# Altium PCB PCB_TA_THI_THU_PHUONG.PcbDoc
Units mm, origin at the board's own origin, x right, y up, seen from the top; angles counter-clockwise.
Board outline 116.52 x 102.67 mm, 2 copper layers (Top Layer, Bottom Layer); 31 components, 26 nets, 105 pads, 26 vias.
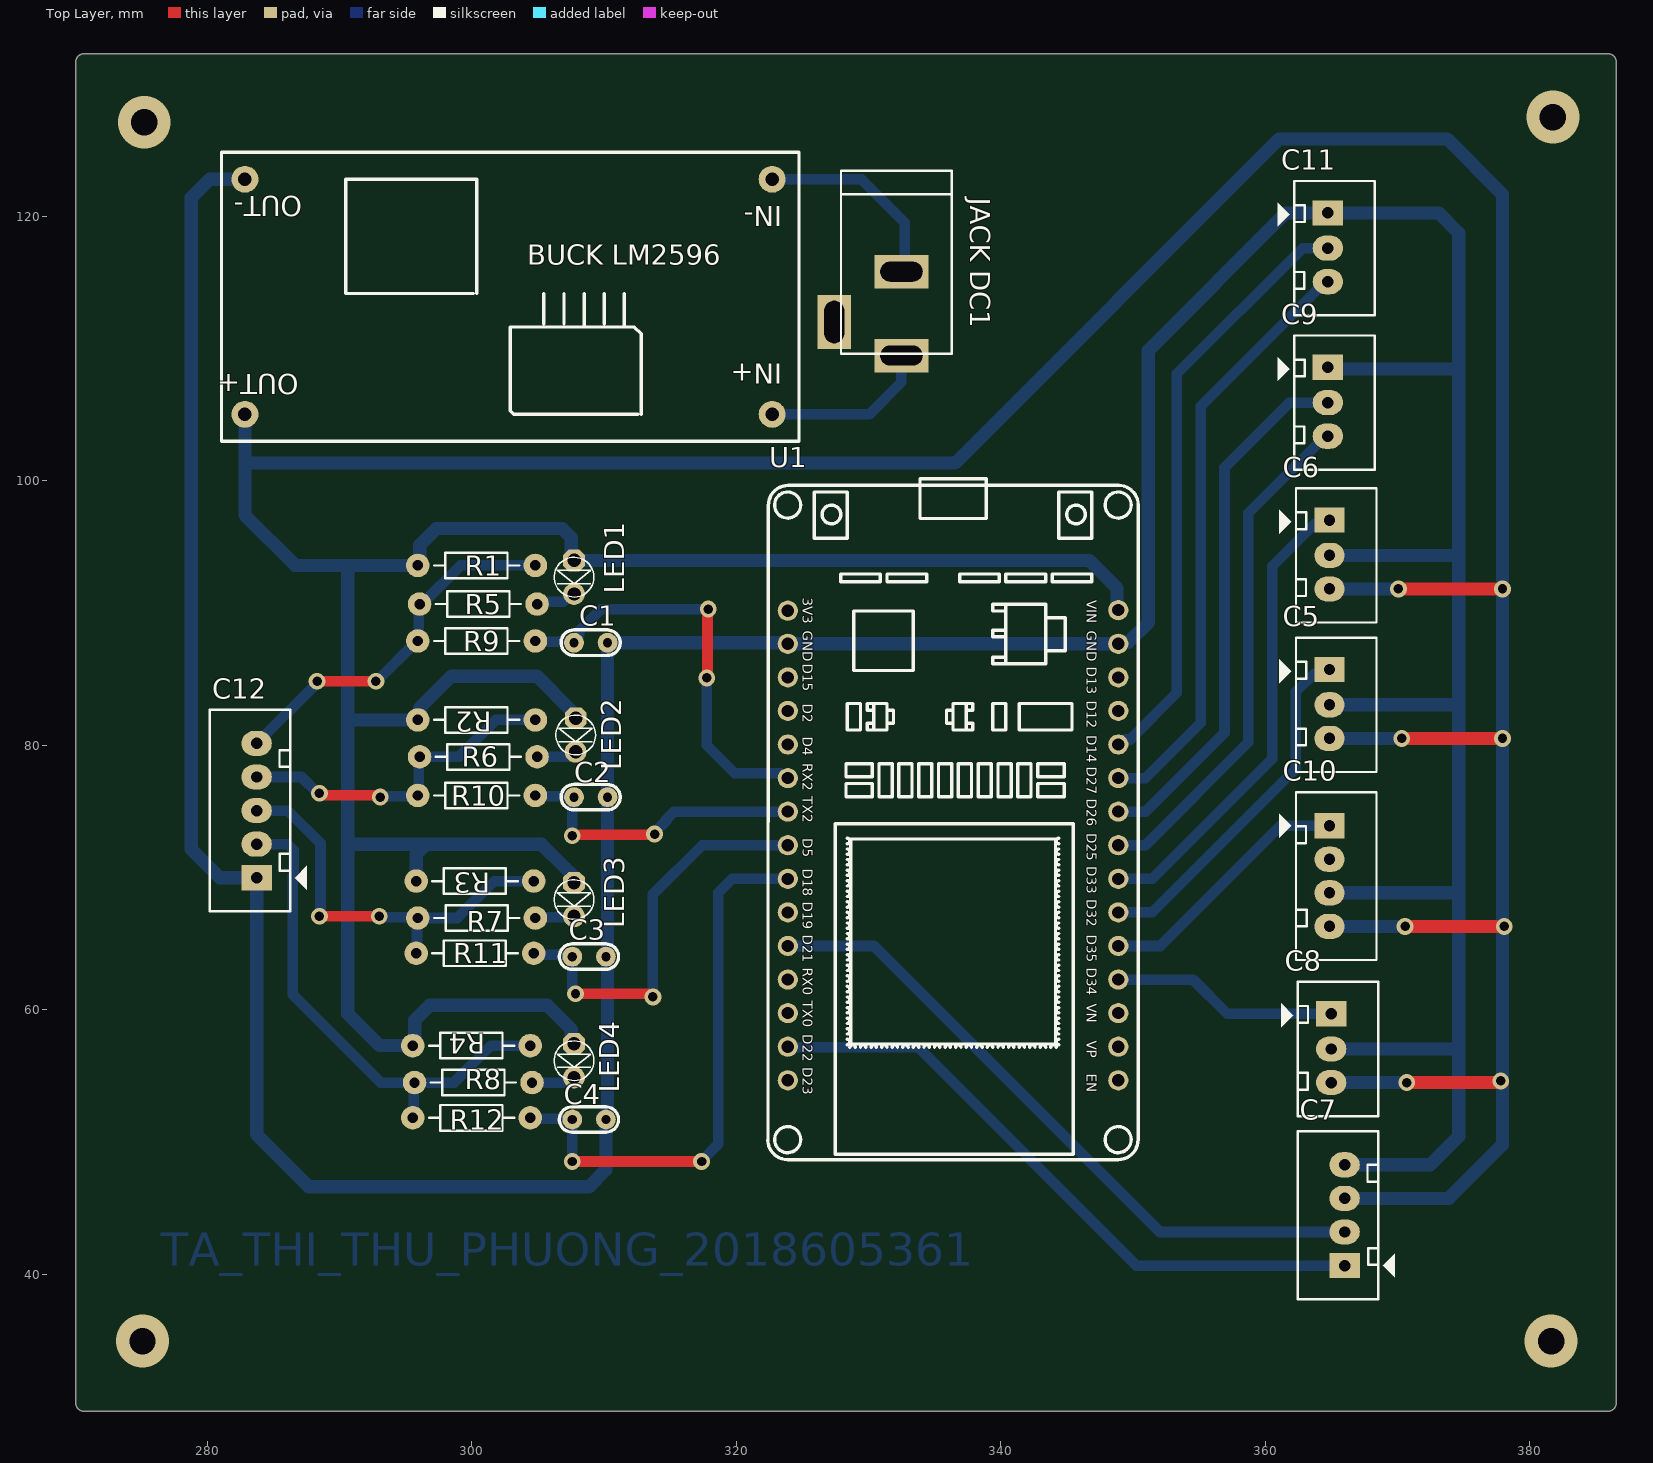
[diagram p0: Top Layer view]
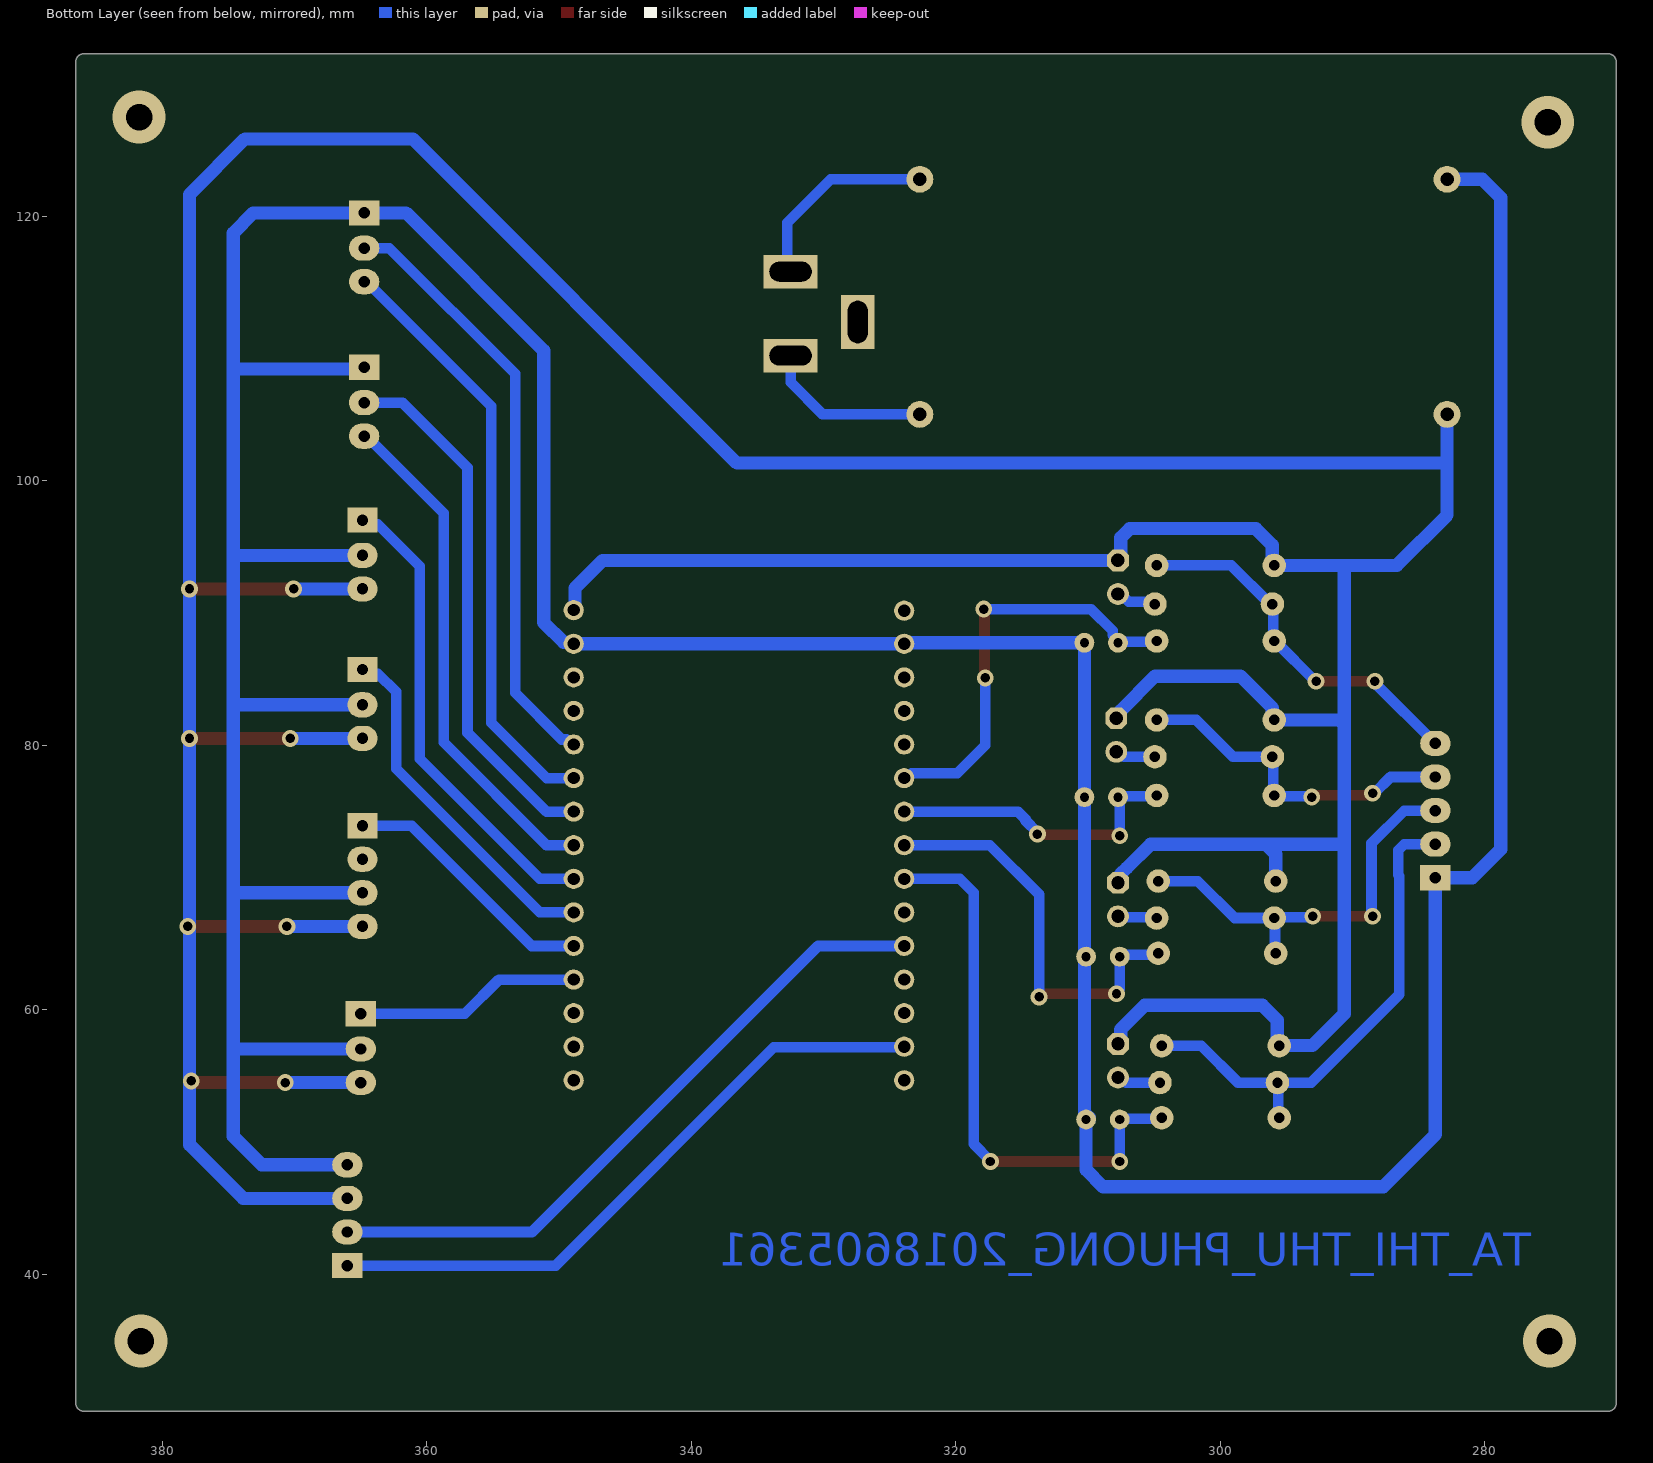
[diagram p1: Bottom Layer view, seen from below]
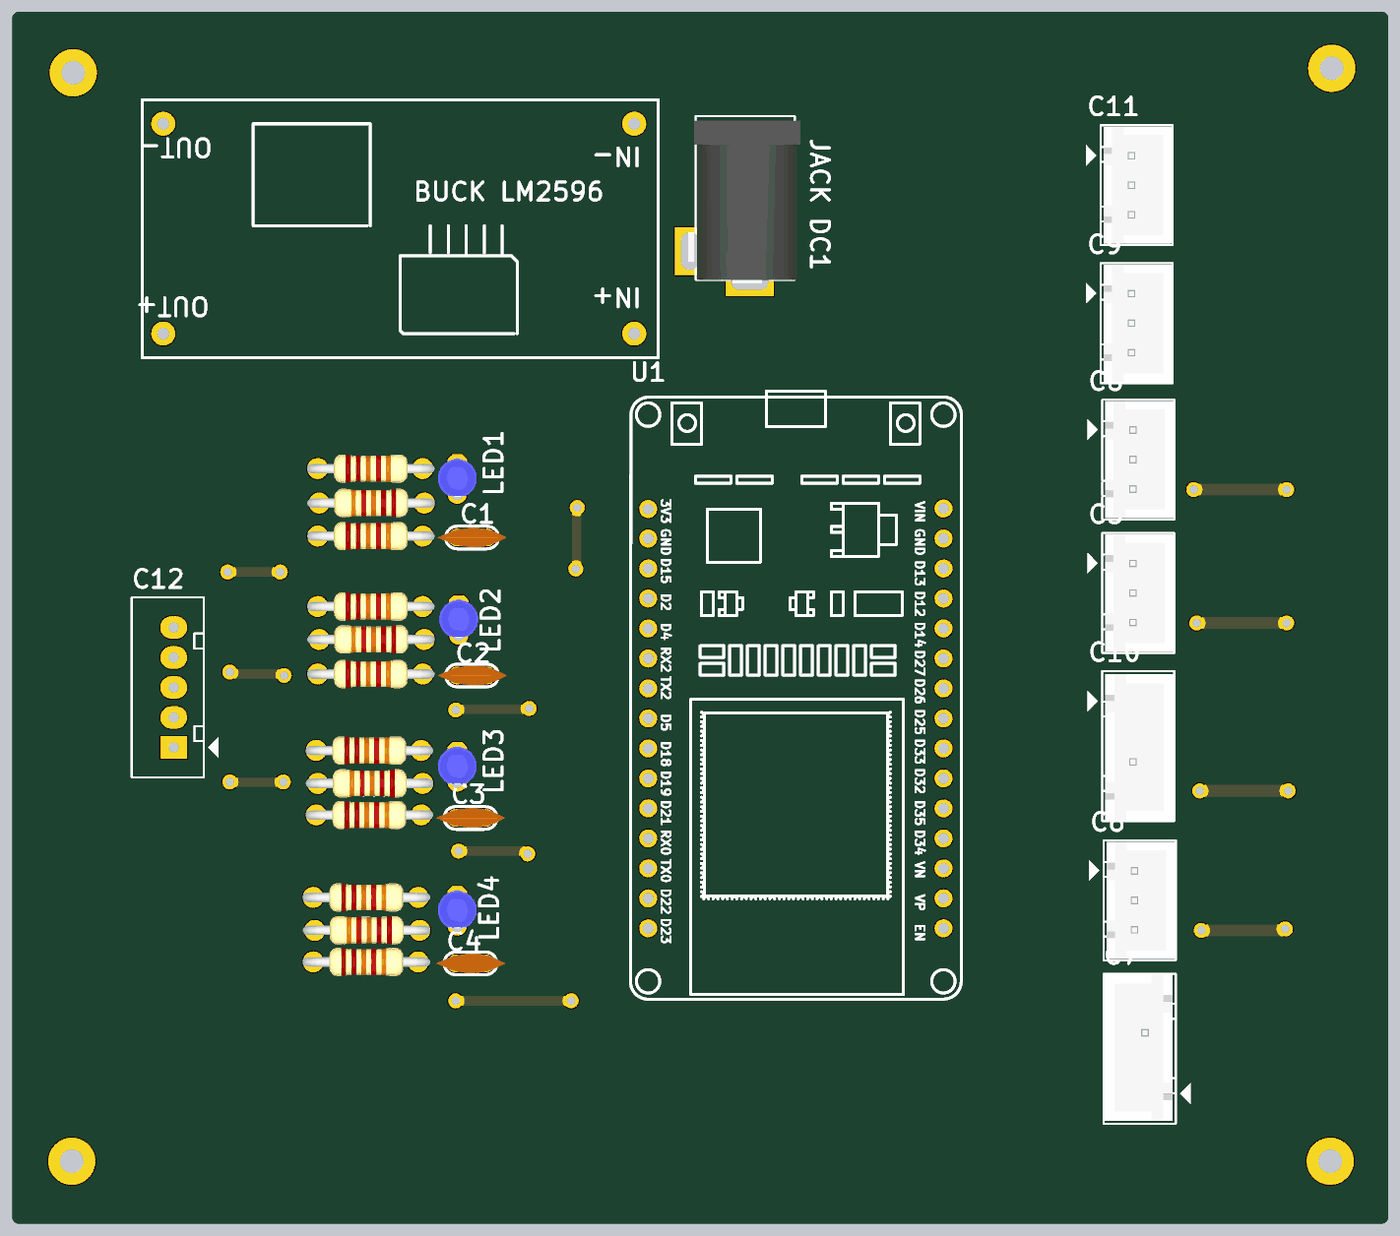
[diagram p2: 3D render of the assembled board from above, using the file's embedded part models]

## Layer stack, top to bottom
Top Solder: solder mask 0.0102, Solder Resist, Dk 3.5
Top Layer: signal copper 0.0356
Dielectric 1: dielectric 0.32, FR-4, Dk 4.8
Bottom Layer: signal copper 0.0356
Bottom Solder: solder mask 0.0102, Solder Resist, Dk 3.5

## Board outline
270.037,30.226 ccw(c270.637,30.226) 270.637,29.626 385.953,29.626 ccw(c385.953,30.226) 386.553,30.226 386.553,131.699 ccw(c385.953,131.699) 385.953,132.299 270.637,132.299 ccw(c270.637,131.699) 270.037,131.699

## Design rules (kind name [scope] priority, off if disabled: settings)
Clearance [All] p1: gap=1 ignorepadtopadclearanceinfootprint=FALSE
PolygonConnect [All] p1: connectstyle=Relief reliefconductorwidth=0.254 reliefentries=4 polygonreliefangle="90 Angle" airgapwidth=0.254
RoutingVias [All] p1: holewidth=0.711 width=1.27 viastyle="Through Hole" minholewidth=0.711 minwidth=1.27 maxholewidth=0.711 maxwidth=1.27
SolderMaskExpansion [All] p1: expansion=0.102 istentingtop=FALSE
Width GND_ISO [InNet('GND_ISO')] p1: maxlimit=1 minlimit=1 preferedwidth=1
Width COM_O_1 [InNet('COM_O_1')] p2: maxlimit=1.5 minlimit=1.5 preferedwidth=1.5
Width COM_O_2 [InNet('COM_O_2')] p3: maxlimit=1.5 minlimit=1.5 preferedwidth=1.5
Width VCC_ISO [InNet('VCC5_ISO')] p4: maxlimit=1 minlimit=1 preferedwidth=1
Width GND [InNet('GND')] p5: maxlimit=1 minlimit=1 preferedwidth=1
Width VCC [InNet('VCC5')] p6: maxlimit=1 minlimit=1 preferedwidth=1
Width SIGNAL [All] p7: maxlimit=0.8 minlimit=0.8 preferedwidth=0.8
30 further rules are at their usual default settings.

## Components (designator, comment, footprint, x,y, rotation, side; value= is the part's Value field where it differs from the comment)
"BUCK LM2596" "Buck LM2596" "BUCK LM2596" 303.149,113.157 r180 top
C1 "104" "tu gom" 308.991,87.757 r0 top
C2 "104" "tu gom" 308.991,76.073 r0 top
C3 "104" "tu gom" 308.864,64.008 r0 top
C4 "104" "tu gom" 308.864,51.689 r0 top
C5 "POS1" Header3 364.871,85.598 r270 top
C6 "POS2" Header3 364.871,96.901 r270 top
C7 "LCD_I2C" Header4 366.014,40.64 r90 top
C8 "SS_LIGHT" Header3 364.998,59.563 r270 top
C9 "Header3" Header3 364.744,108.458 r270 top
C10 "SS-RAIN" Header4 364.871,73.914 r270 top
C11 "Header3" Header3 364.744,120.142 r270 top
C12 "Header5" Header5 283.718,69.977 r90 top
"JACK DC1" "JACK DC 5.5" "JACK DC 5.5" 329.946,112.649 r270 top value="Jac DC"
LED1 "LED 3mm" LED-3MM-BLUE 307.723,92.583 r270 top
LED2 "LED 3mm" LED-3MM-BLUE 307.848,80.645 r270 top
LED3 "LED 3mm" LED-3MM-BLUE 307.721,68.199 r270 top
LED4 "LED 3mm" LED-3MM-BLUE 307.721,56.007 r270 top
R1 "10K" R1/4W 304.8,93.599 r180 top value="R1/4W - 1K"
R2 "10K" R1/4W 304.8,81.915 r180 top value="R1/4W - 1K"
R3 "10K" R1/4W 304.673,69.723 r180 top value="R1/4W - 1K"
R4 "10K" R1/4W 304.419,57.277 r180 top value="R1/4W - 1K"
R5 "220R" R1/4W 296.037,90.678 r0 top value="R1/4W - 1K"
R6 "220R" R1/4W 296.037,79.121 r0 top value="R1/4W - 1K"
R7 "220R" R1/4W 295.91,66.929 r0 top value="R1/4W - 1K"
R8 "220R" R1/4W 295.656,54.483 r0 top value="R1/4W - 1K"
R9 "1K" R1/4W 304.8,87.884 r180 top value="R1/4W - 1K"
R10 "1K" R1/4W 304.8,76.2 r180 top value="R1/4W - 1K"
R11 "1K" R1/4W 304.673,64.262 r180 top value="R1/4W - 1K"
R12 "1K" R1/4W 304.419,51.816 r180 top value="R1/4W - 1K"
U1 "ESP32_MODULE copy" ESP32-WIFIMODULE-FOOTPRINT 334.264,74.168 r180 top

## Footprints (in the part's own frame and the unit in brackets; to place one, negate y for a bottom-side part, rotate by r counter-clockwise, add the part's x,y. Pads: shape width x height; smd on the part's side, far side on the other; paste and mask are expansions set on the pad)
"BUCK LM2596" [mil]
  round 80 hole 40: 1(-770,320) 2(-770,-380) 3(800,-380) 4(800,320)
  silkscreen extent -850,-460 870,400
ESP32-WIFIMODULE-FOOTPRINT [mil]
  round 60 hole 36: 1(-575.9,768.25) 2(-575.9,668.25) 3(-575.9,568.25) 4(-575.9,468.25) 5(-575.9,368.25) 6(-575.9,268.25) 7(-575.9,168.25) 8(-575.9,68.25) 9(-575.9,-31.75) 10(-575.9,-131.75) 11(-575.9,-231.75) 12(-575.9,-331.75) 13(-575.9,-431.75) 14(-575.9,-531.75) 15(-575.9,-631.75) 16(408.35,-630.18) 17(408.35,-531.75) 18(408.35,-431.75) 19(408.35,-331.75) 20(408.35,-231.75) 21(408.35,-131.75) 22(408.35,-31.75) 23(408.35,68.25) 24(408.35,168.25) 25(408.35,268.25) 26(408.35,368.25) 27(408.35,468.25) 28(408.35,568.25) 29(408.35,668.25) 30(408.35,768.25)
  silkscreen extent -635,-1023 468,1005
Header3 [mil] "CON 3"
  rect 75x90 hole 34: 1(-5,0)
  oval 75x90 hole 34: 2(100,0) 3(200,0)
  silkscreen extent -100,-150 300,140, body extent -95,-90 295,136, height 276
Header4 [mil] "CON4"
  rect 75x90 hole 34: 1(0,0)
  oval 75x90 hole 34: 2(100,0) 3(200,0) 4(300,0)
  silkscreen extent -100,-150 400,140, body extent -90,-90 398,136, height 276
Header5 [mil] "CON5"
  rect 75x90 hole 34: 1(0,0)
  oval 75x90 hole 34: 2(100,0) 3(200,0) 4(300,0) 5(400,0)
  silkscreen extent -100,-150 500,140
"JACK DC 5.5" [mm] "Jac DC input"
  rect 2.54x4.064 hole 1.5 slot 3.2 at 90 deg: 1(3.175,2.54) 2(-3.175,2.54)
  rect 4.064x2.54 hole 1.5 slot 3.2 at 0 deg: 3(0.635,-2.54)
  silkscreen extent -10.8,-2.03 3.05,6.35, body extent -10.42,-2.67 3.4,6.84, height 11.02
LED-3MM-BLUE [mil]
  oct 65x65 hole 40: 1(-55,0)
  round 65 hole 40: 2(45,0)
  silkscreen extent -64,-59 54,59, body extent -72,-65 54,65, height 184
R1/4W [mil]
  round 70 hole 31: 1(0,0) 2(350,0)
  silkscreen extent 48,-38 302,38, body extent -40,-47 386,47, height 111
"tu gom" [mm] "Tu gom mini"
  round 1.5 hole 0.7: 1(-1.27,0) 2(1.27,0)
  silkscreen extent -2.25,-0.97 2.22,0.97, body extent -2.92,-0.85 2.92,0.85, height 6.12

## Part data
C1 C2 C3 C4: library part "Tu gom 104 50V", "Cắm", Chung_Loai=Cắm, Don_Vi=Con, Ma_Hang=MH004761, So_Chan=2, Ten_Linh_Kien="Tụ gốm 104 100nF 50V"
C5 C6 C8: library part Header3, "Header IDC, 3 x 1 Pin Vertical 2.54mm Pitch (Non-Boxed, Male)", Manufacturer="W¨¹rth Elektronik eiSos GmbH", partNo=613002143121, ComponentLink1 Description=Manufacturer, ComponentLink1URL=http://www.we-online.com, ComponentLink2 Description=Datasheet, ComponentLink2URL=http://katalog.we-online.de/em/datasheet/6130xx143121.pdf, Created by="Karrer Zheng", Created Date="29 March 2013", NoPins=02
C7 C10: library part Header4, "Header IDC, 4 x 1 Pin Vertical 2.54mm Pitch (Non-Boxed, Male)", Manufacturer="W¨¹rth Elektronik eiSos GmbH", partNo=613002143121, ComponentLink1 Description=Manufacturer, ComponentLink1URL=http://www.we-online.com, ComponentLink2 Description=Datasheet, ComponentLink2URL=http://katalog.we-online.de/em/datasheet/6130xx143121.pdf, Created by="Karrer Zheng", Created Date="29 March 2013", NoPins=02
C9 C11: "Header IDC, 3 x 1 Pin Vertical 2.54mm Pitch (Non-Boxed, Male)", Manufacturer="W¨¹rth Elektronik eiSos GmbH", partNo=613002143121, ComponentLink1 Description=Manufacturer, ComponentLink1URL=http://www.we-online.com, ComponentLink2 Description=Datasheet, ComponentLink2URL=http://katalog.we-online.de/em/datasheet/6130xx143121.pdf, Created by="Karrer Zheng", Created Date="29 March 2013", NoPins=02
C12: "Header IDC, 5 x 1 Pin Vertical 2.54mm Pitch (Non-Boxed, Male)", Manufacturer="W¨¹rth Elektronik eiSos GmbH", partNo=613002143121, ComponentLink1 Description=Manufacturer, ComponentLink1URL=http://www.we-online.com, ComponentLink2 Description=Datasheet, ComponentLink2URL=http://katalog.we-online.de/em/datasheet/6130xx143121.pdf, Created by="Karrer Zheng", Created Date="29 March 2013", NoPins=02
LED1 LED2 LED3 LED4: library part "LED 3mm Xanh Duong", "Cắm", Chung_Loai=Cắm, Don_Vi=Con, Ma_Hang=MH009003, Ten_Linh_Kien="LED 3MM Xanh Dương SS (1000c)"
R1 R2 R3 R4 R5 R6 R7 R8 R9 R10 R11 R12: library part R1/4W, "Resistor 1/4W"

## Via types
v1: diameter 1.27, hole 0.711, Top Layer to Bottom Layer, 22 vias
v2: diameter 4, hole 2, Top Layer to Bottom Layer, 4 vias

## Nets (pads, with @x,y where several pads share a name; then routed paths per layer and width w, separated by ;. In a path a pad name is that pad's centre, name@x,y a point inside that pad or via, vN(x,y) a via of type N, cw(c..) or ccw(c..) an arc to the next point about the centre after c; other vN are vias at no path point)
ADC1: C8.1 U1.4 | length 17.2
  Bottom Layer w0.8: U1.4 354.54,62.274 357.124,59.69 C8.1
ADC2: C10.1 U1.5 | length 19.7
  Bottom Layer w0.8: U1.5 352.058,64.814 361.158,73.914 C10.1
GND: "BUCK LM2596.3" C1.2 C2.2 C3.2 C4.2 C5.2 C6.2 C7.4 C8.2 C9.1 C10.3 C11.1 C12.1 U1.14 U1.17 | length 365.7
  Bottom Layer w1: 282.829,122.809 280.162,122.809 278.765,121.412 278.765,72.136 280.924,69.977 C12.1 283.718,50.546 287.655,46.609 308.864,46.609 310.134,47.879 C4.2 ; C4.2@309.88,51.689 309.88,51.824 310.261,52.205 310.261,63.746 310.134,63.873 C3.2 ; C3.2@310.261,64.008 C2.2 C1.2 323.795,87.757 324.004,87.547 U1.17@324.146,87.547 ; U1.17 U1.14 348.992,87.775 349.651,87.775 351.155,89.279 351.155,109.855 361.569,120.269 C11.1 373.126,120.269 374.65,118.745 374.65,108.458 ; C9.1 364.871,108.458 374.65,108.458 ; C10.3 374.523,68.834 374.65,68.707 ; C5.2 374.65,83.058 ; C6.2 374.523,94.361 374.65,94.234 ; C8.2 374.523,57.023 374.65,56.896 ; C7.4 372.491,48.26 374.65,50.419 374.65,56.896 ; 374.65,56.896 374.65,68.707 ; 374.65,68.707 374.65,83.058 ; 374.65,83.058 374.65,94.234 ; 374.65,94.234 374.65,108.458
IN_0: C1.1 R9.1 U1.21 | length 32
  Top Layer w0.8: v1(317.754,85.09) 317.817,85.153 317.817,90.233 v1(317.881,90.297)
  Bottom Layer w0.8: R9.1 304.863,87.82 307.657,87.82 C1.1 307.721,87.946 308.111,88.336 308.111,88.648 309.76,90.297 v1(317.881,90.297) ; v1(317.754,85.09) 317.754,80.01 319.872,77.892 323.318,77.892 323.696,77.514 U1.21
IN_1: C2.1 R10.1 U1.22 | length 23.1
  Top Layer w0.8: v1(307.594,73.152) 307.657,73.215 313.753,73.215 v1(313.817,73.279)
  Bottom Layer w0.8: R10.1 304.863,76.136 307.657,76.136 C2.1 307.594,75.946 v1(307.594,73.152) ; v1(313.817,73.279) 313.817,73.406 314.717,74.306 314.717,74.409 315.282,74.974 U1.22
IN_2: C3.1 R11.1 U1.23 | length 31.4
  Top Layer w0.8: v1(307.834,61.2) 313.323,61.2 313.563,60.96 v1(313.69,60.96)
  Bottom Layer w0.8: R11.1 304.8,64.135 307.467,64.135 C3.1 307.594,61.567 307.834,61.327 v1(307.834,61.2) ; v1(313.69,60.96) 313.69,68.707 317.417,72.434 U1.23
IN_3: C4.1 R12.1 U1.24 | length 42.5
  Top Layer w0.8: v1(307.594,48.514) v1(317.373,48.514)
  Bottom Layer w0.8: R12.1 304.483,51.752 307.276,51.752 C4.1@307.34,51.689 ; v1(307.594,48.514) C4.1 ; v1(317.373,48.514) 317.373,48.569 318.643,49.839 318.643,68.834 319.703,69.894 U1.24
L298_INA: C9.3 U1.8 | length 38.8
  Bottom Layer w0.8: U1.8 350.951,72.434 358.728,80.211 358.728,97.552 364.553,103.378 C9.3
L298_INB: C9.2 U1.9 | length 40.4
  Bottom Layer w0.8: U1.9 350.945,74.974 356.928,80.957 356.928,101.001 361.845,105.918 C9.2
L298_INC: C11.3 U1.10 | length 45.4
  Bottom Layer w0.8: U1.10 350.94,77.514 355.128,81.703 355.128,105.636 364.553,115.062 C11.3
L298_IND: C11.2 U1.11 | length 45.5
  Bottom Layer w0.8: U1.11 349.088,80.054 349.466,80.432 349.788,80.432 353.328,83.973 353.328,108.091 362.839,117.602 C11.2
"NetBUCK LM2596_2": "BUCK LM2596.2" "JACK DC1.2" | length 15.2
  Bottom Layer w0.8: 322.707,122.809 329.438,122.809 332.74,119.507 332.74,116.078 332.486,115.824
NetLED1_2: LED1.2 R5.2 | length 3.1
  Bottom Layer w0.8: R5.2 305.114,90.865 306.918,90.865 307.493,91.44 LED1.2
NetLED2_2: LED2.2 R6.2 | length 3.1
  Bottom Layer w0.8: R6.2 307.237,79.121 307.618,79.502 LED2.2
NetLED3_2: LED3.2 R7.2 | length 3
  Bottom Layer w0.8: R7.2 304.863,66.992 307.657,66.992 LED3.2
NetLED4_2: LED4.2 R8.2 | length 3.3
  Bottom Layer w0.8: R8.2 307.11,54.483 307.491,54.864 LED4.2
OUT_BTN_0: C12.5 R1.1 R5.1 R9.2 | length 28.3
  Top Layer w0.8: v1(288.29,84.836) v1(292.735,84.836)
  Bottom Layer w0.8: C12.5 288.29,84.709 v1(288.29,84.836) ; v1(292.735,84.836) 292.798,84.836 295.846,87.884 R9.2 295.974,87.947 295.974,90.614 R5.1 296.226,90.678 299.147,93.599 R1.1
OUT_BTN_1: C12.4 R2.1 R6.1 R10.2 | length 25.8
  Top Layer w0.8: v1(288.465,76.363) 288.555,76.273 288.887,76.273 288.96,76.2 292.609,76.2 292.646,76.163 292.978,76.163 v1(293.068,76.073)
  Bottom Layer w0.8: C12.4 287.104,77.597 288.338,76.363 v1(288.465,76.363) ; v1(293.068,76.073) 293.132,76.136 295.846,76.136 R10.2 295.974,76.263 295.974,79.057 R6.1 299.022,79.121 301.815,81.915 R2.1
OUT_BTN_2: C12.3 R3.1 R7.1 R11.2 | length 31.5
  Top Layer w0.8: v1(288.465,67.056) v1(292.989,67.056)
  Bottom Layer w0.8: C12.3 286.067,75.057 288.544,72.58 288.544,67.135 v1(288.465,67.056) ; v1(292.989,67.056) 293.053,66.992 295.846,66.992 R7.1 ; R11.2 295.846,64.325 295.846,66.865 R7.1 ; R3.1 301.689,69.723 298.895,66.929 R7.1
OUT_BTN_3: C12.2 R4.1 R8.1 R12.2 | length 38.6
  Bottom Layer w0.8: C12.2 286.061,72.517 286.53,72.048 286.53,70.197 286.43,70.097 286.43,61.169 293.116,54.483 R8.1 ; R12.2 295.592,51.88 295.592,54.419 R8.1 ; R4.1 301.435,57.277 298.64,54.483 R8.1
SCL: C7.1 U1.29 | length 49
  Bottom Layer w0.8: U1.29 323.936,57.15 333.756,57.15 350.266,40.64 C7.1
SDA: C7.2 U1.26 | length 51.1
  Bottom Layer w0.8: U1.26 330.41,64.814 352.044,43.18 C7.2
SS_IN1: C5.1 U1.6 | length 27
  Bottom Layer w0.8: U1.6 351.459,67.354 362.328,78.223 362.328,84.032 363.706,85.411 364.557,85.411 C5.1
SS_IN2: C6.1 U1.7 | length 35.8
  Bottom Layer w0.8: U1.7 351.453,69.894 360.528,78.969 360.528,93.535 363.706,96.714 364.557,96.714 C6.1
VCC5: "BUCK LM2596.4" C5.3 C6.3 C7.3 C8.3 C10.4 LED1.1 LED2.1 LED3.1 LED4.1 R1.2 R2.2 R3.2 R4.2 U1.15 | length 424.7
  Top Layer w1: v1(370.078,91.821) v1(377.952,91.821) ; v1(370.332,80.518) v1(377.952,80.518) ; v1(370.586,66.294) v1(378.079,66.294) ; v1(370.713,54.483) v1@377.952,54.483
  Bottom Layer w1: 282.829,105.029 282.829,101.346 ; R3.2 295.783,71.755 296.545,72.517 ; LED4.1 307.515,57.61 307.515,58.499 305.689,60.325 296.799,60.325 295.678,59.204 295.678,57.426 R4.2 293.009,57.277 290.6,59.686 290.6,72.517 ; LED3.1 307.515,69.802 307.515,70.259 307.062,70.713 305.258,72.517 296.545,72.517 ; LED2.1 307.848,82.162 307.523,82.487 307.523,82.621 304.927,85.217 298.45,85.217 296.059,82.826 296.059,82.064 R2.2 290.981,81.915 290.6,81.534 ; U1.15 348.792,90.315 348.792,91.898 346.71,93.98 LED1.1 307.518,94.186 307.518,95.707 306.832,96.393 297.307,96.393 296.059,95.145 296.059,93.748 R1.2 290.703,93.599 ; C10.4 v1(370.586,66.294) ; C5.3 v1@370.078,80.518 ; C6.3 v1(370.078,91.821) ; C8.3 v1(370.713,54.483) ; C7.3 373.888,45.72 377.952,49.784 377.952,54.61 377.952,66.294 v1(377.952,80.518) v1(377.952,91.821) 377.952,121.666 373.761,125.857 361.061,125.857 336.55,101.346 282.829,101.346 ; 282.829,101.346 282.829,97.409 286.639,93.599 290.703,93.599 ; 290.6,72.517 290.6,81.534 ; 290.6,72.517 296.545,72.517 ; 290.6,81.534 290.6,81.915 290.6,93.496 290.703,93.599
  other v1: 377.825,54.61
VCC12: "BUCK LM2596.1" "JACK DC1.1" | length 12.8
  Bottom Layer w0.8: 322.707,105.029 330.073,105.029 332.486,107.442 332.486,109.474
pads on no net: "JACK DC1.3" C10.2 U1.1 U1.2 U1.3 U1.12 U1.13 U1.16 U1.18 U1.19 U1.20 U1.25 U1.27 U1.28 U1.30
copper on no net:
  other v2: 275.082,34.925 381.635,34.925 275.209,127.127 381.762,127.508

## Other copper
Bottom Layer:
  text "TA_THI_THU_PHUONG_2018605361" at 276.479,40.64 h2.5

## Silkscreen, mask and mechanical layers (free items; w line width, h text height)
Mechanical 13:
  lines w1.2: 270.637,30.226 385.953,30.226 385.953,131.699 270.637,131.699 270.637,30.226

## Text inside footprints (layer, text, board x,y; h text height)
"BUCK LM2596": Top Overlay "OUT-" at 287.147,121.539 h1.52 r180; Top Overlay "OUT+" at 286.893,108.077 h1.52 r180; Top Overlay "IN-" at 323.469,120.777 h1.52 r180; Top Overlay "IN+" at 323.469,108.839 h1.52 r180
U1: Top Overlay "VIN" at 346.517,90.955 h0.75 r270; Top Overlay "GND" at 346.517,88.655 h0.75 r270; Top Overlay "D13" at 346.517,85.955 h0.75 r270; Top Overlay "D12" at 346.517,83.355 h0.75 r270; Top Overlay "D14" at 346.517,80.754 h0.75 r270; Top Overlay "D27" at 346.517,78.354 h0.75 r270; Top Overlay "D26" at 346.517,75.955 h0.75 r270; Top Overlay "D25" at 346.517,73.354 h0.75 r270; Top Overlay "D33" at 346.517,70.855 h0.75 r270; Top Overlay "D32" at 346.517,68.354 h0.75 r270; Top Overlay "D35" at 346.517,65.654 h0.75 r270; Top Overlay "D34" at 346.517,63.155 h0.75 r270; Top Overlay "VN" at 346.517,60.455 h0.75 r270; Top Overlay "VP" at 346.517,57.654 h0.75 r270; Top Overlay "EN" at 346.517,55.155 h0.75 r270; Top Overlay "3V3" at 325.017,91.154 h0.75 r270; Top Overlay "GND" at 325.017,88.655 h0.75 r270; Top Overlay "D15" at 325.017,86.154 h0.75 r270; Top Overlay "D2" at 325.017,83.154 h0.75 r270; Top Overlay "D4" at 325.017,80.655 h0.75 r270; Top Overlay "RX2" at 325.017,78.655 h0.75 r270; Top Overlay "TX2" at 325.017,76.154 h0.75 r270; Top Overlay "D5" at 325.017,72.955 h0.75 r270; Top Overlay "D18" at 325.017,70.655 h0.75 r270; Top Overlay "D19" at 325.017,68.155 h0.75 r270; Top Overlay "D21" at 325.017,65.654 h0.75 r270; Top Overlay "RX0" at 325.017,63.155 h0.75 r270; Top Overlay "TX0" at 325.017,60.654 h0.75 r270; Top Overlay "D22" at 325.017,58.155 h0.75 r270; Top Overlay "D23" at 325.017,55.654 h0.75 r270